# Altium PCB PCB1.PcbDoc
Units mil, origin at the board's own origin, x right, y up, seen from the top; angles counter-clockwise.
Board outline 2515 x 1490 mil, 2 copper layers (Top Layer, Bottom Layer); 14 components, 8 nets, 35 pads, 0 vias.
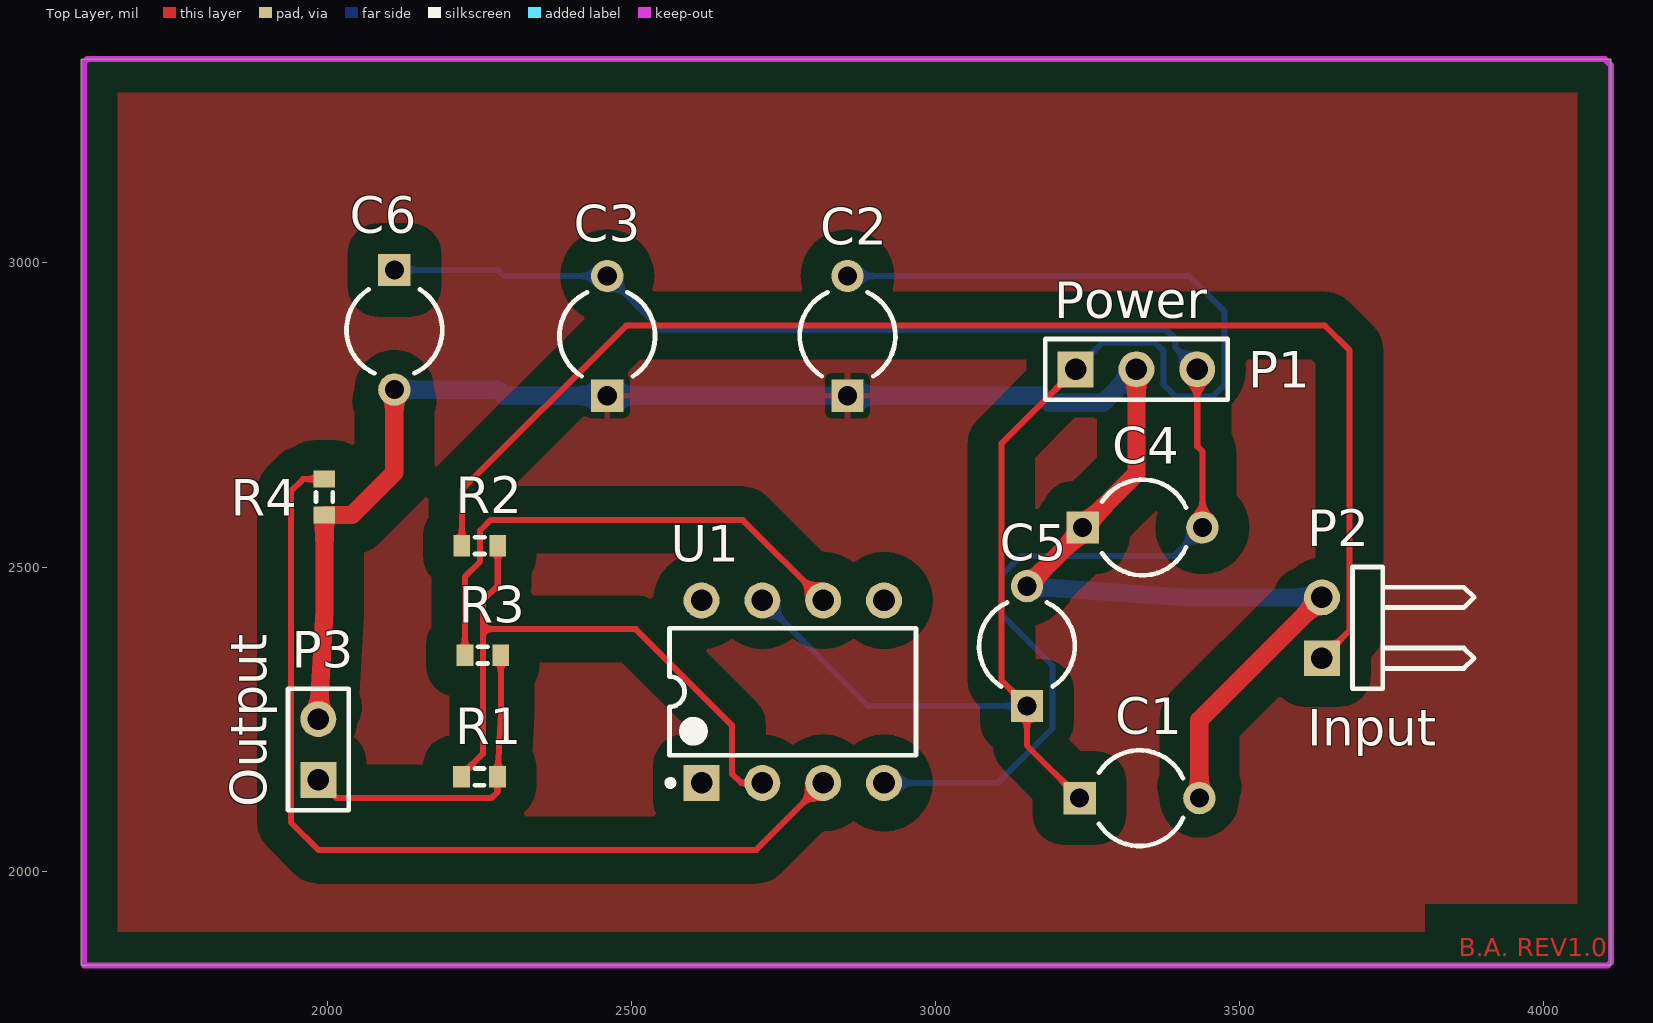
[diagram p0: Top Layer view]
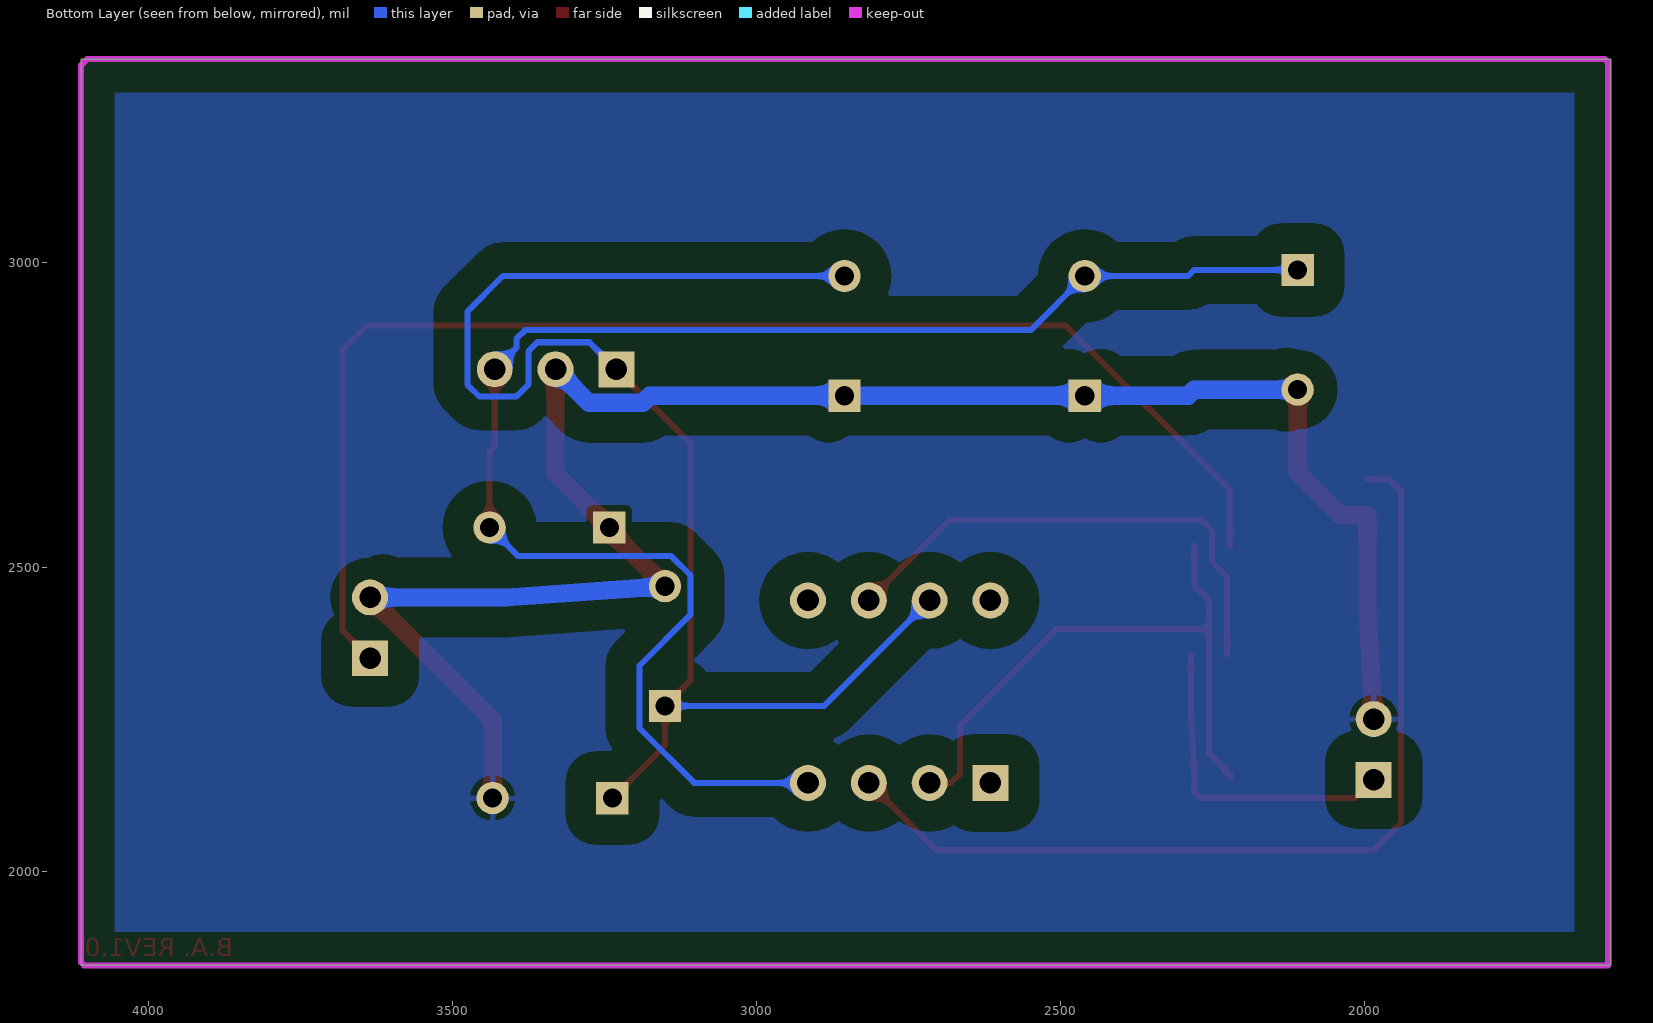
[diagram p1: Bottom Layer view, seen from below]

## Layer stack, top to bottom
Top Solder: solder mask 0.4, Solder Resist, Dk 3.5
Top Layer: signal copper 1.4
Dielectric 1: dielectric 12.6, FR-4, Dk 4.8
Bottom Layer: signal copper 1.4
Bottom Solder: solder mask 0.4, Solder Resist, Dk 3.5

## Board outline
1595,3335 4110,3335 4110,1845 1595,1845

## Design rules (kind name [scope] priority, off if disabled: settings)
Clearance "PolyGon Pour Clearance" [InPolyGon] p1: gap=50 ignorepadtopadclearanceinfootprint=FALSE
Clearance [All] p2: gap=10 ignorepadtopadclearanceinfootprint=FALSE except(0: Arc-Hole Track-Hole SMDPad-Hole THPad-Hole Via-Hole Fill-Hole Poly-Hole Region-Hole Text-Hole)
PolygonConnect [All] p1: connectstyle=Relief reliefconductorwidth=10 reliefentries=4 polygonreliefangle="90 Angle" airgapwidth=10
RoutingVias [All] p1: holewidth=28 width=50 viastyle="Through Hole" minholewidth=28 minwidth=50 maxholewidth=28 maxwidth=50
SolderMaskExpansion [All] p1: expansion=4
Width "GND net width" [InNet('GND')] p1: maxlimit=30 minlimit=10 preferedwidth=30
Width [All] p2: maxlimit=10 minlimit=10 preferedwidth=10
30 further rules are at their usual default settings.

## Components (designator, comment, footprint, x,y, rotation, side; value= is the part's Value field where it differs from the comment)
C1 "Cap Pol1" CAPR5-4X5 3335,2120 r0 top value=100pF
C2 "Cap" CAPR5-4X5 2855,2880 r90 top value=100pF
C3 "Cap" CAPR5-4X5 2460,2880 r90 top value=100pF
C4 "Cap Pol1" CAPR5-4X5 3340,2565 r0 top value=100pF
C5 "Cap" CAPR5-4X5 3150,2370 r90 top value=100pF
C6 "Cap" CAPR5-4X5 2110,2890 r270 top value=100pF
P1 "Power" HDR1X3 3230,2825 r0 top
P2 "Input" HDR1X2H 3635,2350 r90 top
P3 "Output" HDR1X2 1985,2150 r90 top
R1 "Res3" J1-0603 2250,2155 r0 top value=1K
R2 "Res3" J1-0603 2250.47,2535 r0 top value=1K
R3 "Res3" J1-0603 2255.47,2355 r0 top value=1K
R4 "Res3" J1-0603 1995,2615 r90 top value=1K
U1 "LM741J" J08A 2765,2295 r90 top

## Footprints (in the part's own frame and the unit in brackets; to place one, negate y for a bottom-side part, rotate by r counter-clockwise, add the part's x,y. Pads: shape width x height; smd on the part's side, far side on the other; paste and mask are expansions set on the pad)
CAPR5-4X5 [mm] "Capacitor; 2 Leads"
  rect 1.35x1.35 hole 0.8: 1(-2.5,0)
  round 1.35 hole 0.8: 2(2.5,0)
  silkscreen extent -1.69,-2 1.82,2
HDR1X2 [mm] "Connector; Header; 2 Position"
  rect 1.5x1.5 hole 0.9: 1(0,0)
  round 1.5 hole 0.9: 2(2.54,0)
  silkscreen extent -1.27,-1.27 3.81,1.27
HDR1X2H [mm] "Connector; Header; 2 Position; Right Angle"
  rect 1.5x1.5 hole 0.9: 1(0,0)
  round 1.5 hole 0.9: 2(2.54,0)
  silkscreen extent -1.27,-6.35 3.81,-1.27
HDR1X3 [mm] "Connector; Header; 3 Position"
  rect 1.5x1.5 hole 0.9: 1(0,0)
  round 1.5 hole 0.9: 2(2.54,0) 3(5.08,0)
  silkscreen extent -1.27,-1.27 6.35,1.27
J1-0603 [mm] "Chip Resistor, Body 1.6x0.8mm, IPC High Density"
  rect 0.7x0.9 smd: 1(-0.75,0) 2(0.75,0)
  silkscreen extent -0.2,-0.35 0.2,0.35, body extent -0.85,-0.48 0.85,0.48, height 0.9
J08A [mm] "DIP, 8-Pin, Row Spacing 7.62 mm, Pitch 2.54 mm"
  rect 1.5x1.5 hole 0.9: 1(-3.81,3.81)
  round 1.5 hole 0.9: 2(-3.81,1.27) 3(-3.81,-1.27) 4(-3.81,-3.81) 5(3.81,-3.81) 6(3.81,-1.27) 7(3.81,1.27) 8(3.81,3.81)
  silkscreen extent -3.93,-5.15 2.65,5.23, body extent -3.6,-5.15 3.6,5.15, height 5.08

## Part data
C1 C4: "Polarized Capacitor (Radial)", LatestRevisionDate=17-Jul-2002, LatestRevisionNote="Re-released for DXP Platform.", PackageDescription="Polarized Capacitor (Radial); 2 Leads", PackageReference=RB7.6-15, Published=8-Jun-2000, Publisher="Altium Limited"
C2 C3 C5 C6: "Capacitor", LatestRevisionDate=17-Jul-2002, LatestRevisionNote="Re-released for DXP Platform.", PackageDescription="Radial Cap, Thru-Hole; 2 Leads; 0.3 in Pin Spacing", PackageReference=RAD-0.3, Published=8-Jun-2000, Publisher="Altium Limited"
P1: library part "Header 3", "Header, 3-Pin", LatestRevisionDate=17-Jul-2002, LatestRevisionNote="Re-released for DXP Platform.", Publisher="Altium Limited"
P2: library part "Header 2H", "Header, 2-Pin, Right Angle", LatestRevisionDate=17-Jul-2002, LatestRevisionNote="Re-released for DXP Platform.", Publisher="Altium Limited"
P3: library part "Header 2", "Header, 2-Pin", LatestRevisionDate=17-Jul-2002, LatestRevisionNote="Re-released for DXP Platform.", Publisher="Altium Limited"
R1 R2 R3 R4: "Resistor", LatestRevisionDate=29-May-2009, LatestRevisionNote="IPC-7351 Footprint Added.", PackageDescription="Chip Resistor", PackageReference=J1-0603, Published=8-Jun-2000, Publisher="Altium Limited"
U1: "Operational Amplifier, 8-pin CerDIP", Manufacturer="National Semiconductor", PackageTopMarking=NSUZXYTT*LM741J, PowerWise=N, ComponentLink1Description="Manufacturer URL", ComponentLink1URL=http://www.national.com/, ComponentLink2Description="LM741 Datasheet", ComponentLink2URL=http://www.national.com/ds/LM/LM741.pdf, ComponentLink3Description="LM741 Web Page", ComponentLink3URL=http://www.national.com/pf/LM/LM741.html, ComponentLink4Description="J08A Package Page", ComponentLink4URL=http://www.national.com/packaging/folders/j08a.html, CompType=Amplifiers, DatasheetVersion=Aug-2000, High-Reliability=Y, PackageDescription="Cerdip, .400 x .310in Body, 8 Lead, .300in Centers, .100in Pitch", PackageReference=J08A, PackageVersion="revM, Jul-2002", PartNumber=LM741J, PinCount=8, RoHS=N

## Nets (pads, with @x,y where several pads share a name; then routed paths per layer and width w, separated by ;. In a path a pad name is that pad's centre, name@x,y a point inside that pad or via, vN(x,y) a via of type N, cw(c..) or ccw(c..) an arc to the next point about the centre after c; other vN are vias at no path point)
+12V: C1.1 C2.2 C5.1 P1.1 U1.7 | length 2420.9
  Top Layer w10: P1.1 3108,2703 3108,2313.57 C5.1 3150,2206.57 C1.1
  Bottom Layer w10: U1.7 2888.43,2271.57 C5.1 ; C2.2 3416.57,2978.43 3475,2920 3475,2800 3455,2780 3394.53,2780 3374.53,2800 3374.53,2855 3360,2869.53 3274.53,2869.53 P1.1
-12V: C3.2 C4.2 C6.1 P1.3 U1.4 | length 2622.9
  Top Layer w10: P1.3 3430,2698.43 3438.43,2690 C4.2
  Bottom Layer w10: C6.1 2280,2988.43 2290,2978.43 C3.2 2548.9,2889.53 3380,2889.53 3394.53,2875 3394.53,2860.47 P1.3 ; U1.4 3102,2145 3192,2235 3192,2338 3108,2422 3108,2486 3140,2518 3391.43,2518 C4.2
GND: C1.2 C2.1 C3.1 C4.1 C5.2 C6.2 P1.2 P2.2 P3.2 R4.1 | length 3197.8
  Top Layer w30: P3.2 1995,2427 R4.1 2040,2585.47 2110,2655.47 C6.2 ; C5.2 3241.57,2560 C4.1 3330,2653.43 P1.2 ; C1.2 3433.43,2248.43 P2.2
  Bottom Layer w30: C6.2 2280,2791.57 2290,2781.57 C3.1 C2.1 3175,2781.57 3186.57,2770 3275,2770 P1.2 ; C5.2 3411.43,2450 P2.2
Input: P2.1 R2.1 | length 2205.1
  Top Layer w10: R2.1 2220.94,2626.94 2491,2897 3640,2897 3680,2857 3680,2395 P2.1
NetR1_1: R1.1 R2.2 U1.2 | length 1015.8
  Top Layer w10: R1.1 2220.47,2158 2255.47,2193 2255.47,2398 ; R2.2 2280,2469.53 2255.47,2445 2255.47,2398 ; U1.2 2680,2145 2665,2160 2665,2240 2507,2398 2255.47,2398
NetR3_1: R3.1 U1.6 | length 841.1
  Top Layer w10: R3.1 2225.94,2484 2251,2509.06 2251,2560 2268,2577 2683,2577 U1.6
NetR4_2: R4.2 U1.3 | length 1547
  Top Layer w10: R4.2 1960,2644.53 1940,2624.53 1940,2080 1985,2035 2705,2035 U1.3
Output: P3.1 R1.2 R3.2 | length 536.2
  Top Layer w10: P3.1 2015,2120 2269.53,2120 2279.53,2130 R1.2 2285,2260.47 R3.2
pads on no net: U1.1 U1.5 U1.8

## Polygon pours and split planes (outlines as drawn)
GND on Top Layer "Keep-Out Layer-No Net" (solid, pour order 0): 4095,3330 4100,3335 4105,3330 4105,1845 1600,1845 1600,3330
GND on Bottom Layer "Keep-Out Layer-No Net" (solid, pour order 2): 1605,3335 1615,3325 4110,3325 4110,1850 4105,1845 1600,1845

## Keep-outs
Keep-Out Layer:
  lines w10: 1600,1845 1675,1845 4105,1845 4110,1850 4110,3325 4100,3335 1605,3335 1600,3330 1600,1845

## Other copper
Top Layer:
  text "B.A. REV1.0" at 3860,1860 h30